# Altium PCB Pixracer_V1_FMU_Alternative.PcbDoc
Units mil, origin at the board's own origin, x right, y up, seen from the top; angles counter-clockwise.
Board outline 5849.21 x 3487.01 mil, 2 copper layers (Top, Bottom); 139 components, 145 nets, 555 pads, 0 vias.
Unrouted connection lines stored in the file: 97.
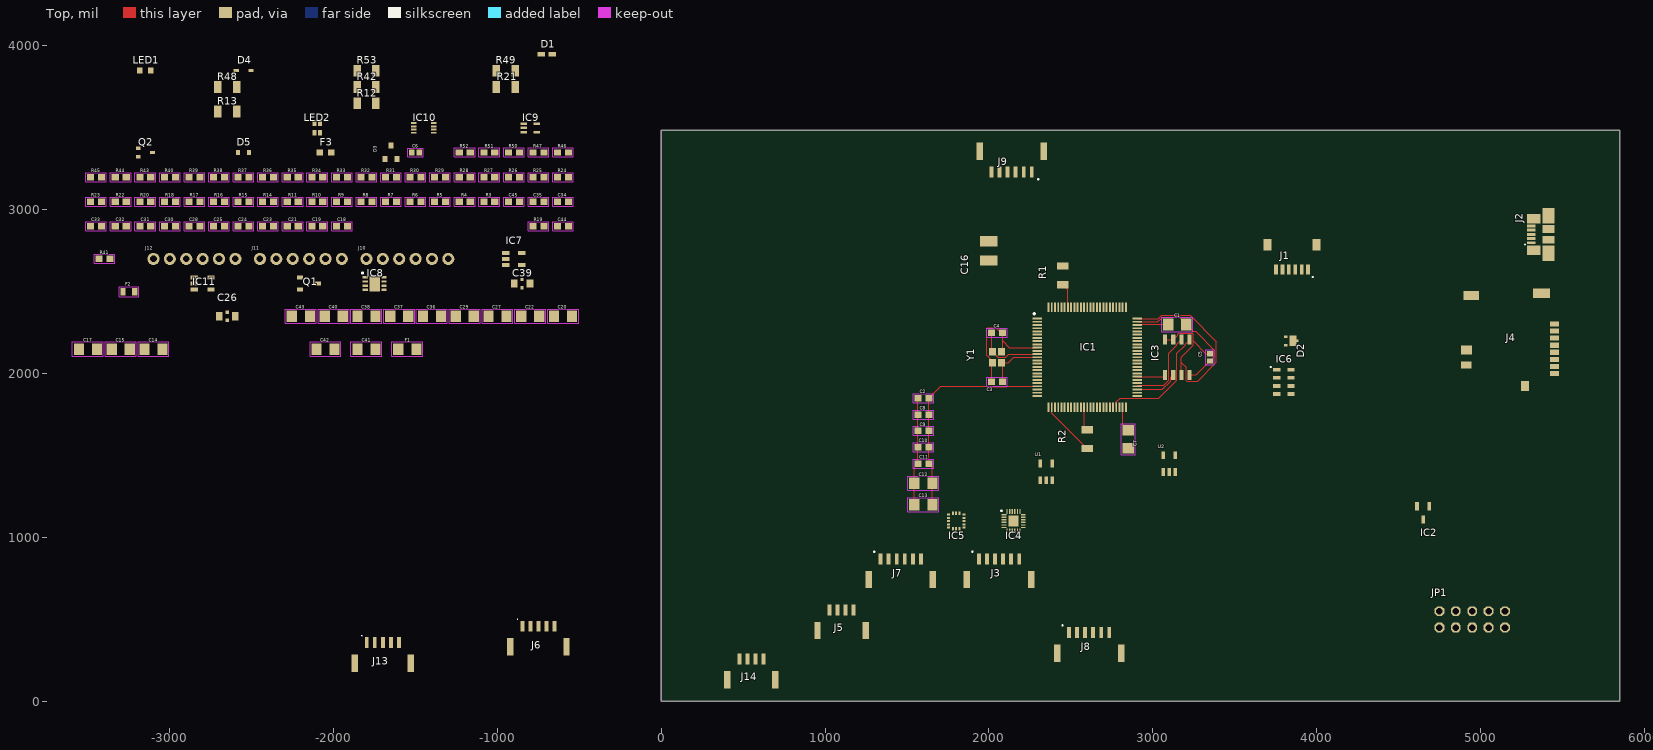
[diagram p0: Top view]
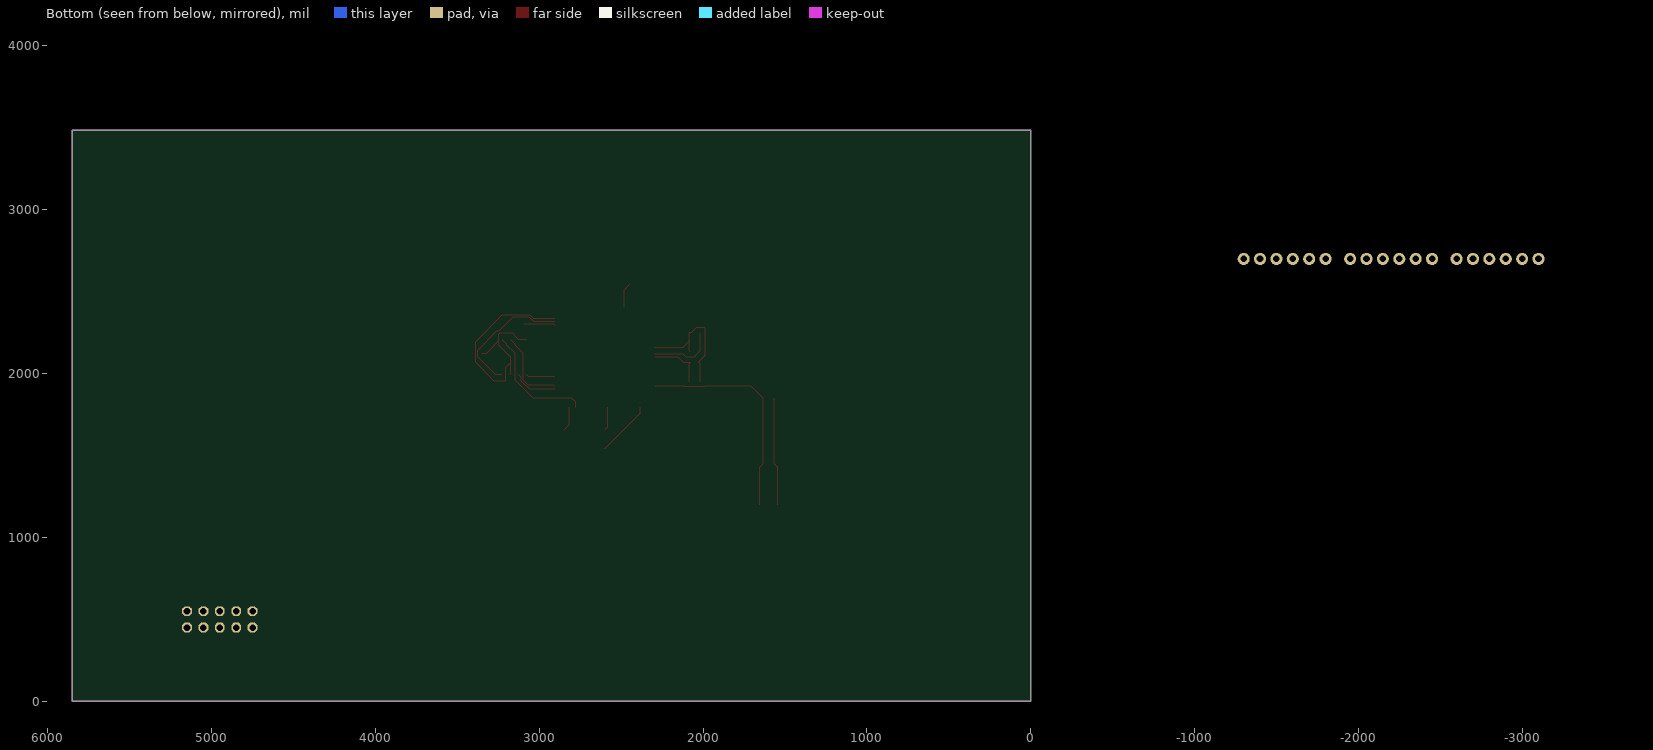
[diagram p1: Bottom view, seen from below]

## Layer stack, top to bottom
Top Solder: solder mask 0.4, Solder Resist, Dk 3.5
Top: signal copper 1.378
Dielectric 1: dielectric 12.6, FR-4, Dk 4.8
Bottom: signal copper 1.378
Bottom Solder: solder mask 0.4, Solder Resist, Dk 3.5

## Board outline
0,3487.01 0,0 5849.21,0 5849.21,3487.01

## Design rules (kind name [scope] priority, off if disabled: settings)
BoardOutlineClearance mdCopperDimension [All] p1: gap=10 ignorepadtopadclearanceinfootprint=FALSE except(0: Arc-SplitContinuation Track-SplitContinuation SMDPad-SplitContinuation THPad-SplitContinuation Via-SplitContinuation Fill-SplitContinuation Poly-SplitContinuation Region-SplitContinuation Text-SplitContinuation; 40: Poly-OutlineEdge Poly-CavityEdge Poly-CutoutEdge Poly-SplitBarrior)
Clearance "Clearance (Same Net)" [All] p1: gap=6 ignorepadtopadclearanceinfootprint=FALSE
Clearance [All] p2: gap=6 ignorepadtopadclearanceinfootprint=FALSE
HoleSize [All] p1: absolutevalues=TRUE maxlimit=100000 minlimit=13.78 maxpercent=80.000 minpercent=20.000
HoleToHoleClearance mdDrill [All] p1: gap=6 allowstackedmicrovias=TRUE
MinimumSolderMaskSliver [All] p1 off: minsoldermaskwidth=10
PasteMaskExpansion mlMinCreamFrame [All] p1: expansion=0
PolygonConnect ThermalVias [IsVia] p1: connectstyle=Direct reliefconductorwidth=10 reliefentries=4 polygonreliefangle="90 Angle" airgapwidth=10
PolygonConnect [All] p2: connectstyle=Relief reliefconductorwidth=10 reliefentries=4 polygonreliefangle="90 Angle" airgapwidth=10
RoutingVias [All] p1: holewidth=13.78 width=29.78 viastyle="Through Hole" minholewidth=13.78 minwidth=29.78 maxholewidth=100 maxwidth=100
SolderMaskExpansion mlMinStopFrame [All] p1: expansion=4 istentingtop=FALSE
Width [All] p1: maxlimit=10 minlimit=6 preferedwidth=6
26 further rules are at their usual default settings.

## Components (designator, comment, footprint, x,y, rotation, side; value= is the part's Value field where it differs from the comment)
C1 "2.2uF" 1206 3150,2300 r0 top
C2 "0.1uF" 0603 1600,1850 r0 top
C3 "8.0pF" 0603 2050,1950 r180 top
C4 "8.0pF" 0603 2050,2250 r0 top
C5 "0.1uF" 0402 3350,2100 r90 top
C6 "0.1uF" 0402 -1500,3350 r0 top
C7 "2.2uF" 1206 2850,1600 r270 top
C8 "0.1uF" 0603 1600,1750 r0 top
C9 "0.1uF" 0603 1600,1650 r0 top
C10 "0.1uF" 0603 1600,1550 r0 top
C11 "0.1uF" 0603 1600,1450 r0 top
C12 "2.2uF" 1206 1600,1330 r0 top
C13 "2.2uF" 1206 1600,1200 r0 top
C14 "2.2uF" 1206 -3100,2150 r0 top
C15 "10uF" 1206 -3300,2150 r0 top
C16 "" 4TPE220MBB 2000,2750 r270 top
C17 "2.2uF" 1206 -3500,2150 r0 top
C18 "0.1uF" 0603 -1950,2900 r0 top
C19 "0.1uF" 0603 -2100,2900 r0 top
C20 "2.2uF" 1206 -600,2350 r0 top
C21 "0.1uF" 0603 -2250,2900 r0 top
C22 "2.2uF" 1206 -800,2350 r0 top
C23 "0.1uF" 0603 -2400,2900 r0 top
C24 "470nF" 0603 -2550,2900 r0 top
C25 "0.1uF" 0603 -2700,2900 r0 top
C26 "" W2H13C1048AT1A -2650,2350 r0 top
C27 "2.2uF" 1206 -1000,2350 r0 top
C28 "0.1uF" 0603 -2850,2900 r0 top
C29 "10uF" 1206 -1200,2350 r0 top
C30 "0.1uF" 0603 -3000,2900 r0 top
C31 "0.1uF" 0603 -3150,2900 r0 top
C32 "0.1uF" 0603 -3300,2900 r0 top
C33 "10nF" 0603 -3450,2900 r0 top
C34 "10nF" 0603 -600,3050 r0 top
C35 "0.1uF" 0603 -750,3050 r0 top
C36 "2.2uF" 1206 -1400,2350 r0 top
C37 "2.2uF" 1206 -1600,2350 r0 top
C38 "2.2uF" 1206 -1800,2350 r0 top
C39 "" W2H13C1048AT1A -850,2550 r0 top
C40 "2.2uF" 1206 -2000,2350 r0 top
C41 "100uF" 1206-POLAR -1800,2150 r0 top
C42 "100uF" 1206-POLAR -2050,2150 r0 top
C43 "10uF" 1206 -2200,2350 r0 top
C44 "10uF" 0603-POLAR -600,2900 r0 top
C45 "0.1uF" 0603 -900,3050 r0 top
D1 "" DIOM179X85N -700,3950 r0 top
D2 "" PMEG2020CPASX 3845,2200 r270 top
D3 "5.6V" SOT23-3 -1650,3350 r0 top
D4 "" SODFL2512X80N -2550,3850 r0 top
D5 "" 1N4448XTP -2550,3350 r0 top
F1 "2A RST FUSE" 1206 -1550,2150 r0 top
F2 "0.3A RST FUSE" 0805 -3250,2500 r0 top
F3 "" 0603L050SLYR -2050,3350 r0 top
IC1 "STM32F427VIT6" QFP50P1600X1600X160-100N 2600,2100 r0 top
IC2 "" SOT95P237X112-3N 4650,1150 r180 top
IC3 "" SOIC127P602X173-8N 3150,2100 r90 top
IC4 "" QFN40P300X300X105-25N 2150,1100 r0 top
IC5 "" IAM20680HP 1800,1100 r0 top
IC6 "" MS561101BA03-50 3800,1950 r0 top
IC7 "" SOT95P280X145-5N -900,2700 r0 top
IC8 "" SON65P300X300X100-9N -1750,2550 r0 top
IC9 "" SOT65P210X110-5N -800,3500 r0 top
IC10 "" SOP50P310X100-8N -1450,3500 r0 top
IC11 "" SOT95P285X130-5N -2800,2550 r0 top
J1 "" SM06B-SRSS-TB 3850,2650 r180 top
J2 "" 47346-0001 5500,2850 r270 top
J3 "" SM06B-GHS-TB 1850,700 r0 top
J4 "" PJS00821200 4900,2200 r0 top
J5 "" SM04B-GHS-TB 1100,550 r0 top
J6 "" SM05B-GHS-TB -750,450 r0 top
J7 "" SM06B-GHS-TB 1250,700 r0 top
J8 "" SM06B-GHS-TB 2400,250 r0 top
J9 "" SM06B-GHS-TB 2350,3400 r180 top
J10 "" 1X06_NO_SILK -1800,2700 r0 top
J11 "" 1X06_NO_SILK -2450,2700 r0 top
J12 "" 1X06_NO_SILK -3100,2700 r0 top
J13 "" SM05B-GHS-TB -1700,350 r0 top
J14 "" SM04B-GHS-TB 550,250 r0 top
JP1 "" 2X05 4950,500 r0 top
LED1 "" LEDC1608X28N -3150,3850 r0 top
LED2 "" LTST-C19HE1WT -2100,3500 r0 top
Q1 "" SOT95P280X130-3N -2150,2550 r0 top
Q2 "" SOT65P210X100-3N -3150,3350 r0 top
R1 "" RESC3216X74N 2450,2600 r90 top
R2 "" RESC3216X74N 2600,1600 r90 top
R3 "220" 0603 -1050,3050 r0 top
R4 "1k" 0603 -1200,3050 r0 top
R5 "220" 0603 -1350,3050 r0 top
R6 "22Ω" 0603 -1500,3050 r0 top
R7 "22Ω" 0603 -1650,3050 r0 top
R8 "1k" 0603 -1800,3050 r0 top
R9 "1k" 0603 -1950,3050 r0 top
R10 "1M" 0603 -2100,3050 r0 top
R11 "1M" 0603 -2250,3050 r0 top
R12 "" RESC3216X74N -1800,3650 r0 top
R13 "" RESC3216X74N -2650,3600 r0 top
R14 "100k" 0603 -2400,3050 r0 top
R15 "100k" 0603 -2550,3050 r0 top
R16 "100k" 0603 -2700,3050 r0 top
R17 "100k" 0603 -2850,3050 r0 top
R18 "100k" 0603 -3000,3050 r0 top
R19 "120OHM" 0603 -750,2900 r0 top
R20 "220" 0603 -3150,3050 r0 top
R21 "" RESC3216X74N -950,3750 r0 top
R22 "1k" 0603 -3300,3050 r0 top
R23 "1k" 0603 -3450,3050 r0 top
R24 "220" 0603 -600,3200 r0 top
R25 "220" 0603 -750,3200 r0 top
R26 "220" 0603 -900,3200 r0 top
R27 "220" 0603 -1050,3200 r0 top
R28 "220" 0603 -1200,3200 r0 top
R29 "220" 0603 -1350,3200 r0 top
R30 "220" 0603 -1500,3200 r0 top
R31 "220" 0603 -1650,3200 r0 top
R32 "1.5k" 0603 -1800,3200 r0 top
R33 "1.5k" 0603 -1950,3200 r0 top
R34 "220" 0603 -2100,3200 r0 top
R35 "220" 0603 -2250,3200 r0 top
R36 "220" 0603 -2400,3200 r0 top
R37 "220" 0603 -2550,3200 r0 top
R38 "220" 0603 -2700,3200 r0 top
R39 "220" 0603 -2850,3200 r0 top
R40 "1.5k" 0603 -3000,3200 r0 top
R41 "68OHM-0603-1/10W-1%" 0603 -3400,2700 r0 top
R42 "" RESC3216X74N -1800,3750 r0 top
R43 "470" 0603 -3150,3200 r0 top
R44 "220" 0603 -3300,3200 r0 top
R45 "220" 0603 -3450,3200 r0 top
R46 "220" 0603 -600,3350 r0 top
R47 "10" 0603 -750,3350 r0 top
R48 "" RESC3216X74N -2650,3750 r0 top
R49 "" RESC3216X74N -950,3850 r0 top
R50 "100" 0603 -900,3350 r0 top
R51 "100" 0603 -1050,3350 r0 top
R52 "100" 0603 -1200,3350 r0 top
R53 "" RESC3216X74N -1800,3850 r0 top
U1 "" SOT23-5 2350,1400 r0 top
U2 "" SOT23-5 3100,1450 r0 top
Y1 "" FA20H160000MF12ZAC3 2050,2100 r90 top

## Footprints (in the part's own frame and the unit in brackets; to place one, negate y for a bottom-side part, rotate by r counter-clockwise, add the part's x,y. Pads: shape width x height; smd on the part's side, far side on the other; paste and mask are expansions set on the pad)
1N4448XTP [mil] "1N4448XTP"
  rect 23.62x31.5 smd: 1(-33.46,0) 2(33.46,0)
1X06_NO_SILK [mil] "1X06_NO_SILK"
  round 74 hole 40: 1(0,0) 2(100,0) 3(200,0) 4(300,0) 5(400,0) 6(500,0)
2X05 [mil] "2X05"
  oct 60x60 / inner round 55.43 / far side oct 60x60 hole 40: 1(-200,-50) 2(-200,50) 3(-100,-50) 4(-100,50) 5(0,-50) 6(0,50) 7(100,-50) 8(100,50) 9(200,-50) 10(200,50)
4TPE220MBB [mil] "4TPE220MBB"
  rect 62.99x106.3 smd: 1(-59.06,0) 2(59.06,0)
0402 [mil] "0402"
  rect 33.46x35.43 smd: 1(-22.83,0) 2(22.83,0)
  Top keep-out lines w2: -47.24,25.59 -47.24,-25.59 47.24,-25.59 47.24,25.59 -47.24,25.59
0603 [mm] "0603"
  rect 1.1x1 smd: 1(-0.85,0) 2(0.85,0)
  Top keep-out lines w0.051: -1.6,-0.7 -1.6,0.7 1.6,0.7 1.6,-0.7 -1.6,-0.7
0603-POLAR [mm] "0603-POLAR"
  rect 1.1x1 smd: +(0.85,0) -(-0.85,0)
  Top keep-out lines w0.051: -1.6,-0.7 -1.6,0.7 1.6,0.7 1.6,-0.7 -1.6,-0.7
0603L050SLYR [mm] "0603L050SLYR"
  rect 1x1 smd: 1(-0.9,0) 2(0.9,0)
0805 [mil] "0805"
  rect 31.5x47.24 smd: 1(-35.43,0) 2(35.43,0)
  Top keep-out lines w2: -59.06,-31.5 -59.06,31.5 59.06,31.5 59.06,-31.5 -59.06,-31.5
1206 [mil] "1206"
  rect 62.99x70.87 smd: 1(-55.12,0) 2(55.12,0)
  Top keep-out lines w2: -94.49,-43.31 -94.49,43.31 94.49,43.31 94.49,-43.31 -94.49,-43.31
1206-POLAR [mil] "1206-POLAR"
  rect 62.99x70.87 smd: 1(-55.12,0) 2(55.12,0)
  Top keep-out lines w2: -94.49,-43.31 -94.49,43.31 94.49,43.31 94.49,-43.31 -94.49,-43.31
47346-0001 [mm] "47346-0001"
  rect 0.45x1.38 smd: 1(1.3,-4.81) 2(0.65,-4.81) 3(0,-4.81) 4(-0.65,-4.81) 5(-1.3,-4.81)
  rect 1.475x2.1 smd: 6(-2.453,-4.45) 7(2.453,-4.45)
  rect 1.175x1.9 smd: 8(0.837,-2.15) 9(-0.837,-2.15)
  rect 2.375x1.9 smd: 10(2.913,-2.15) 11(-2.913,-2.15)
  silkscreen extent 1.53,-5.84 1.62,-5.74
DIOM179X85N [mil] "DIOM179X85N"
  rect 45.28x29.53 smd: 1(-33.46,0) 2(33.46,0)
FA20H160000MF12ZAC3 [mil] "FA20H160000MF12ZAC3"
  rect 47.24x43.31 smd: 1(-33.46,-27.56) 2(33.46,-27.56) 3(33.46,27.56) 4(-33.46,27.56)
IAM20680HP [mm] "IAM20680HP"
  rect 0.5x0.3 smd: 1(-1.2,1) 2(-1.2,0.5) 3(-1.2,0) 4(-1.2,-0.5) 5(-1.2,-1) 9(1.2,-1) 10(1.2,-0.5) 11(1.2,0) 12(1.2,0.5) 13(1.2,1)
  rect 0.3x0.5 smd: 6(-0.5,-1.2) 7(0,-1.2) 8(0.5,-1.2) 14(0.5,1.2) 15(0,1.2) 16(-0.5,1.2)
LEDC1608X28N [mil] "LEDC1608X28N"
  rect 31.5x37.4 smd: 1(-33.46,0) 2(33.46,0)
LTST-C19HE1WT [mm] "LTST-C19HE1WT"
  rect 0.65x0.85 smd: 1(-0.425,0.725) 2(0.425,0.725) 3(0.425,-0.725) 4(-0.425,-0.725)
MS561101BA03-50 [mil] "MS561101BA03-50"
  rect 43.31x23.62 smd: 1(-43.31,73.82) 2(-43.31,24.61) 3(-43.31,-24.61) 4(-43.31,-73.82) 5(43.31,-73.82) 6(43.31,-24.61) 7(43.31,24.61) 8(43.31,73.82)
  silkscreen extent -82,89 -78,92
PJS00821200 [mil] "PJS00821200"
  rect 55.12x31.5 smd: 1(551.18,103.35) 2(551.18,60.04) 3(551.18,16.73) 4(551.18,-26.57) 5(551.18,-69.88) 6(551.18,-113.19) 7(551.18,-156.5) 8(551.18,-199.8)
  rect 51.18x59.06 smd: CD1(372.05,-275.59)
  rect 102.36x57.09 smd: G1(472.44,290.35)
  rect 94.49x55.12 smd: G2(43.31,277.56)
  rect 67.72x55.12 smd: G3(14.17,-55.12)
  rect 65.75x43.31 smd: MP1(13.19,-147.64)
PMEG2020CPASX [mm] "PMEG2020CPASX"
  rect 0.4x0.6 smd: 1(-0.65,-0.85) 2(0.65,-0.85)
  rect 1.6x1.1 smd: 3(0,0.25)
  rect 0.4x0.35 smd: 4(0,0.975)
QFN40P300X300X105-25N [mm] "QFN40P300X300X105-25N"
  rect 0.75x0.2 smd: 1(-1.5,1) 2(-1.5,0.6) 3(-1.5,0.2) 4(-1.5,-0.2) 5(-1.5,-0.6) 6(-1.5,-1) 13(1.5,-1) 14(1.5,-0.6) 15(1.5,-0.2) 16(1.5,0.2) 17(1.5,0.6) 18(1.5,1)
  rect 0.2x0.75 smd: 7(-1,-1.5) 8(-0.6,-1.5) 9(-0.2,-1.5) 10(0.2,-1.5) 11(0.6,-1.5) 12(1,-1.5) 19(1,1.5) 20(0.6,1.5) 21(0.2,1.5) 22(-0.2,1.5) 23(-0.6,1.5) 24(-1,1.5)
  rect 1.59x1.75 smd: 25(0,0)
  silkscreen extent -1.97,1.5 -1.77,1.7
QFP50P1600X1600X160-100N [mm] "QFP50P1600X1600X160-100N"
  rect 1.475x0.3 smd: 1(-7.738,6) 2(-7.738,5.5) 3(-7.738,5) 4(-7.738,4.5) 5(-7.738,4) 6(-7.738,3.5) 7(-7.738,3) 8(-7.738,2.5) 9(-7.738,2) 10(-7.738,1.5) 11(-7.738,1) 12(-7.738,0.5) 13(-7.738,0) 14(-7.738,-0.5) 15(-7.738,-1) 16(-7.738,-1.5) 17(-7.738,-2) 18(-7.738,-2.5) 19(-7.738,-3) 20(-7.738,-3.5) 21(-7.738,-4) 22(-7.738,-4.5) 23(-7.738,-5) 24(-7.738,-5.5) 25(-7.738,-6) 51(7.738,-6) 52(7.738,-5.5) 53(7.738,-5) 54(7.738,-4.5) 55(7.738,-4) 56(7.738,-3.5) 57(7.738,-3) 58(7.738,-2.5) 59(7.738,-2) 60(7.738,-1.5) 61(7.738,-1) 62(7.738,-0.5) 63(7.738,0) 64(7.738,0.5) 65(7.738,1) 66(7.738,1.5) 67(7.738,2) 68(7.738,2.5) 69(7.738,3) 70(7.738,3.5) 71(7.738,4) 72(7.738,4.5) 73(7.738,5) 74(7.738,5.5) 75(7.738,6)
  rect 0.3x1.475 smd: 26(-6,-7.738) 27(-5.5,-7.738) 28(-5,-7.738) 29(-4.5,-7.738) 30(-4,-7.738) 31(-3.5,-7.738) 32(-3,-7.738) 33(-2.5,-7.738) 34(-2,-7.738) 35(-1.5,-7.738) 36(-1,-7.738) 37(-0.5,-7.738) 38(0,-7.738) 39(0.5,-7.738) 40(1,-7.738) 41(1.5,-7.738) 42(2,-7.738) 43(2.5,-7.738) 44(3,-7.738) 45(3.5,-7.738) 46(4,-7.738) 47(4.5,-7.738) 48(5,-7.738) 49(5.5,-7.738) 50(6,-7.738) 76(6,7.738) 77(5.5,7.738) 78(5,7.738) 79(4.5,7.738) 80(4,7.738) 81(3.5,7.738) 82(3,7.738) 83(2.5,7.738) 84(2,7.738) 85(1.5,7.738) 86(1,7.738) 87(0.5,7.738) 88(0,7.738) 89(-0.5,7.738) 90(-1,7.738) 91(-1.5,7.738) 92(-2,7.738) 93(-2.5,7.738) 94(-3,7.738) 95(-3.5,7.738) 96(-4,7.738) 97(-4.5,7.738) 98(-5,7.738) 99(-5.5,7.738) 100(-6,7.738)
  silkscreen extent -8.35,6.63 -8.1,6.87
RESC3216X74N [mil] "RESC3216X74N"
  rect 45.28x70.87 smd: 1(-57.09,0) 2(57.09,0)
SM04B-GHS-TB [mm] "SM04B-GHS-TB"
  rect 0.6x1.7 smd: 1(-1.875,0.2) 2(-0.625,0.2) 3(0.625,0.2) 4(1.875,0.2)
  rect 1x2.7 smd: 5(-3.725,-3) 6(3.725,-3)
SM05B-GHS-TB [mm] "SM05B-GHS-TB"
  rect 0.6x1.7 smd: 1(-2.5,0.2) 2(-1.25,0.2) 3(0,0.2) 4(1.25,0.2) 5(2.5,0.2)
  rect 1x2.7 smd: 6(-4.35,-3) 7(4.35,-3)
  silkscreen extent -3.3,1.25 -3.23,1.32
SM06B-GHS-TB [mm] "SM06B-GHS-TB"
  rect 0.6x1.7 smd: 1(2.25,4.3) 2(3.5,4.3) 3(4.75,4.3) 4(6,4.3) 5(7.25,4.3) 6(8.5,4.3)
  rect 1x2.7 smd: 7(0.4,1.1) 8(10.35,1.1)
  silkscreen extent 1.19,5.35 1.31,5.47
SM06B-SRSS-TB [mil] "SM06B-SRSS-TB"
  rect 23.62x61.02 smd: 1(-98.43,15.75) 2(-59.06,15.75) 3(-19.69,15.75) 4(19.69,15.75) 5(59.06,15.75) 6(98.43,15.75)
  rect 47.24x70.87 smd: 7(149.61,-136.81) 8(-149.61,-136.81)
  silkscreen extent -129,57 -124,62
SODFL2512X80N [mm] "SODFL2512X80N"
  rect 0.84x0.46 smd: 1(-1.15,0) 2(1.15,0)
SOIC127P602X173-8N [mm] "SOIC127P602X173-8N"
  rect 1.551x0.65 smd: 1(-2.725,1.905) 2(-2.725,0.635) 3(-2.725,-0.635) 4(-2.725,-1.905) 5(2.725,-1.905) 6(2.725,-0.635) 7(2.725,0.635) 8(2.725,1.905)
SON65P300X300X100-9N [mm] "SON65P300X300X100-9N"
  rect 0.85x0.35 smd: 1(-1.45,0.975) 2(-1.45,0.325) 3(-1.45,-0.325) 4(-1.45,-0.975) 5(1.45,-0.975) 6(1.45,-0.325) 7(1.45,0.325) 8(1.45,0.975)
  rect 1.65x2.45 smd: 9(0,0)
  silkscreen extent -2,1.53 -1.75,1.77
SOP50P310X100-8N [mil] "SOP50P310X100-8N"
  rect 33.46x11.81 smd: 1(-62.01,29.53) 2(-62.01,9.84) 3(-62.01,-9.84) 4(-62.01,-29.53) 5(62.01,-29.53) 6(62.01,-9.84) 7(62.01,9.84) 8(62.01,29.53)
SOT23-3 [mil] "SOT23-3"
  rect 31.5x35.43 smd: 1(-37.4,-39.37) 2(37.4,-39.37) 3(0,43.31)
SOT23-5 [mil] "SOT23-5"
  rect 21.65x47.24 smd: 1(-37.4,-51.19) 2(0,-51.19) 3(37.4,-51.19) 4(37.4,51.19) 5(-37.4,51.19)
SOT65P210X100-3N [mm] "SOT65P210X100-3N"
  rect 0.75x0.5 smd: 1(-1.1,0.65) 2(-1.1,-0.65) 3(1.1,0)
SOT65P210X110-5N [mm] "SOT65P210X110-5N"
  rect 1x0.4 smd: 1(-1,0.65) 2(-1,0) 3(-1,-0.65) 4(1,-0.65) 5(1,0.65)
SOT95P237X112-3N [mil] "SOT95P237X112-3N"
  rect 22x50 smd: 1(-37,-41) 2(37,-41) 3(0,41)
SOT95P280X130-3N [mil] "SOT95P280X130-3N"
  rect 35.43x23.62 smd: 1(-55.12,37.4) 2(-55.12,-37.4) 3(55.12,0)
SOT95P280X145-5N [mil] "SOT95P280X145-5N"
  rect 45.28x23.62 smd: 1(-49.21,37.4) 2(-49.21,0) 3(-49.21,-37.4) 4(49.21,-37.4) 5(49.21,37.4)
SOT95P285X130-5N [mil] "SOT95P285X130-5N"
  rect 45.28x23.62 smd: 1(-51.18,37.4) 2(-51.18,0) 3(-51.18,-37.4) 4(51.18,-37.4) 5(51.18,37.4)
W2H13C1048AT1A [mil] "W2H13C1048AT1A"
  rect 40.16x50 smd: 1(-48.23,0) 2(48.23,0)
  rect 20.08x20.08 smd: 3(0,25) 4(0,-25)

## Part data
C1 C7 C12 C13 C14 C15 C17 C20 C22 C27 C29 C36 C37 C38 C40 C43 F1: library part 1206, PackageName=1206
C2 C3 C4 C8 C9 C10 C11 C18 C19 C21 C23 C24 C25 C28 C30 C31 C32 C33 C34 C35 C45 R3 R4 R5 R6 R7 R8 R9 R10 R11 R14 R15 R16 R17 R18 R19 R20 R22 R23 R24 R25 R26 R27 R28 R29 R30 R31 R32 R33 R34 R35 R36 R37 R38 R39 R40 R41 R43 R44 R45 R46 R47 R50 R51 R52: library part 0603, PackageName=0603
C5 C6: library part 0402, PackageName=0402
C16: library part 4TPE220MBB, PackageName=4TPE220MBB
C26 C39: library part W2H13C1048AT1A, PackageName=W2H13C1048AT1A
C41 C42: library part 1206-POLAR, PackageName=1206-POLAR
C44: library part 0603-POLAR, PackageName=0603-POLAR
D1: library part DIOM179X85N, PackageName=DIOM179X85N
D2: library part PMEG2020CPASX, PackageName=PMEG2020CPASX
D3: library part SOT23-3, PackageName=SOT23-3
D4: library part SODFL2512X80N, PackageName=SODFL2512X80N
D5: library part 1N4448XTP, PackageName=1N4448XTP
F2: library part 0805, PackageName=0805
F3: library part 0603L050SLYR, PackageName=0603L050SLYR
IC1: library part QFP50P1600X1600X160-100N, PackageName=QFP50P1600X1600X160-100N
IC2: library part SOT95P237X112-3N, PackageName=SOT95P237X112-3N
IC3: library part SOIC127P602X173-8N, PackageName=SOIC127P602X173-8N
IC4: library part QFN40P300X300X105-25N, PackageName=QFN40P300X300X105-25N
IC5: library part IAM20680HP, PackageName=IAM20680HP
IC6: library part MS561101BA03-50, PackageName=MS561101BA03-50
IC7: library part SOT95P280X145-5N, PackageName=SOT95P280X145-5N
IC8: library part SON65P300X300X100-9N, PackageName=SON65P300X300X100-9N
IC9: library part SOT65P210X110-5N, PackageName=SOT65P210X110-5N
IC10: library part SOP50P310X100-8N, PackageName=SOP50P310X100-8N
IC11: library part SOT95P285X130-5N, PackageName=SOT95P285X130-5N
J1: library part SM06B-SRSS-TB, PackageName=SM06B-SRSS-TB
J2: library part 47346-0001, PackageName=47346-0001
J3 J7 J8 J9: library part SM06B-GHS-TB, PackageName=SM06B-GHS-TB
J4: library part PJS00821200, PackageName=PJS00821200
J5 J14: library part SM04B-GHS-TB, PackageName=SM04B-GHS-TB
J6 J13: library part SM05B-GHS-TB, PackageName=SM05B-GHS-TB
J10 J11 J12: library part 1X06_NO_SILK, PackageName=1X06_NO_SILK
JP1: library part 2X05, PackageName=2X05
LED1: library part LEDC1608X28N, PackageName=LEDC1608X28N
LED2: library part LTST-C19HE1WT, PackageName=LTST-C19HE1WT
Q1: library part SOT95P280X130-3N, PackageName=SOT95P280X130-3N
Q2: library part SOT65P210X100-3N, PackageName=SOT65P210X100-3N
R1 R2 R12 R13 R21 R42 R48 R49 R53: library part RESC3216X74N, PackageName=RESC3216X74N
U1 U2: library part SOT23-5, PackageName=SOT23-5
Y1: library part FA20H160000MF12ZAC3, PackageName=FA20H160000MF12ZAC3

## Nets (pads, with @x,y where several pads share a name; then routed paths per layer and width w, separated by ;. In a path a pad name is that pad's centre, name@x,y a point inside that pad or via, vN(x,y) a via of type N, cw(c..) or ccw(c..) an arc to the next point about the centre after c; other vN are vias at no path point)
8266_CTS: IC1.41 JP1.10
8266_GPIO0: IC1.1 JP1.6
8266_GPIO2: IC1.90 JP1.4
8266_PD: IC1.4 JP1.3
8266_RST: IC1.5
8266_RTS: IC1.67 JP1.5 JP1.9
20608_CS: IC1.9 IC5.6
20608_DRDY: IC1.8 IC5.5
ALARM: IC1.77 R48.1
BARO_CS: IC1.88 IC6.5
BAT_VOLT_SENS: C34.1 R9.2
BATT_CURRENT_SENS: C33.1 IC1.26 R8.1
BATT_VOLT_SENS: IC1.25
BOOT0: IC1.94 R1.1 | length 151.5
  Top w6: R1.1 2481.89,2511.02 IC1.94
BOOT1: IC1.37 R2.2 | length 146.4
  Top w6: IC1.37 2580.32,1676.77 R2.2
BUZZER+: D5.1 J13.5 R47.2
BUZZER-: D5.2 J13.4 Q1.3
CAN1_RX: IC1.81 IC8.4
CAN1_TX: IC1.82 IC8.1
CAN2_RX: IC1.51
CAN2_TX: IC1.52
FMU_CH1: IC1.45 R34.2
FMU_CH2: IC1.44 R35.2
FMU_CH3: IC1.42 R36.2
FMU_CH4: IC1.40 R37.2
FMU_CH5: IC1.60 R38.2
FMU_CH6: IC1.61 R39.2
FMU_I2C1_SCL: IC1.95 J9.4 R32.2
FMU_I2C1_SDA: IC1.96 J9.5 R33.2
FMU_LED_BLUE: IC1.89 R52.1
FMU_LED_GREEN: IC1.36 R51.1
FMU_LED_RED: IC1.48 R50.1
FMU_RC_INPUT: IC1.64 IC9.4
FMU_SWCLK: IC1.76 J1.5
FMU_SWDIO: IC1.72 J1.4
FMU_UART7_RX: IC1.38 J1.3
FMU_UART7_TX: IC1.39 J1.2
FMU_USART1_TX: IC1.92 JP1.8
FMU_USART2_CTS: IC1.84 R30.1
FMU_USART2_RTS: IC1.85 R31.1
FMU_USART2_RX: IC1.87 R29.2
FMU_USART2_TX: IC1.86 R28.2
FMU_USART3_CTS: IC1.58 R26.1
FMU_USART3_RTS: IC1.59 R27.1
FMU_USART3_RX: IC1.56 R25.2
FMU_USART3_TX: IC1.55 R24.2
FMU_USART4_RX: IC1.24 J9.3
FMU_USART4_TX: IC1.23 J9.2
FMU_USART8_RX: IC1.97 IC10.3
FMU_USART8_TX: IC1.98 IC10.2
FMU_USART_RX: IC1.93 JP1.1
FMU_VBAT: C16.1 D1.1 IC1.6
FMU_VDD_3V3: C2.2 C5.2 C6.2 C8.2 C9.2 C10.2 C11.2 C12.2 C13.2 C15.1 C35.2 IC1.11 IC1.19 IC1.21 IC1.22 IC1.28 IC1.50 IC1.75 IC1.100 IC2.2 IC3.3 IC3.7 IC3.8 IC8.5 IC9.5 IC10.8 J1.1 J4.4 J13.3 LED2.4 R3.2 R4.1 R14.2 R15.1 R16.1 R17.1 R18.1 R32.1 R33.1 U2.5 | length 3000.8
  Top w6: C13.2 C12.2 1655.12,1428.35 C11.2 C10.2 C9.2 C8.2 C2.2 1706.3,1922.83 1989.63,1922.83 1991.15,1921.32 2108.85,1921.32 2110.37,1922.83 IC1.22 ; IC1.75 3034.47,2336.22 3054.69,2356.43 3228.34,2356.43 3388.72,2196.06 3388.72,2068.71 3273.2,1953.19 3208.48,1953.19 3203.2,1958.46 3203.2,2037.66 3175,2065.87 ; IC3.8 IC3.7 3153.2,2235.49 3153.2,2241.54 3158.48,2246.82 3241.52,2246.82 3246.8,2241.54 3246.8,2200 ; IC3.3 3175,2000 3175,2065.87 ; C5.2 3323.96,2122.83 3246.8,2200 ; 3175,2065.87 3175,2101.23 3246.8,2173.02 3246.8,2200
FRAM_CS: IC1.57 IC3.1 | length 174.8
  Top w6: IC1.57 3064.17,1981.89 IC3.1
FRAM_MISO: IC1.53 IC3.2 IC6.6 | length 270.9
  Top w6: IC1.53 3058.46,1903.15 3108.8,1953.49 3108.8,1976.51 IC3.2
FRAM_MOSI: IC1.54 IC3.6 IC6.7 | length 488.1
  Top w6: IC1.54 2909.43,1927.61 3065.95,1927.61 3096.8,1958.46 3096.8,2123.02 3146.8,2173.02 3146.8,2179.08 IC3.6
FRAM_SCK: IC1.47 IC3.5 IC6.8 | length 738
  Top w6: IC1.47 2777.17,1827.17 2800,1850 2870.76,1850 2871.88,1848.87 3037.21,1848.87 3146.8,1958.46 3146.8,2123.02 3196.8,2173.02 3196.8,2179.08 IC3.5
FRSKY_IN: J14.3 R23.2
FRSKY_INV: IC1.69 IC10.1 IC10.5
FRSKY_OUT: J14.2 R22.2
GND: C1.2 C2.1 C3.2 C4.2 C5.1 C6.1 C7.2 C8.1 C9.1 C10.1 C11.1 C12.1 C13.1 C14.2 C15.2 C16.2 C17.2 C18.2 C19.1 C20.2 C21.2 C22.2 C23.2 C24.2 C25.2 C26.3 C26.4 C27.2 C28.2 C29.2 C30.2 C31.2 C32.1 C33.2 C34.2 C35.1 C36.2 C37.1 C38.1 C39.3 C39.4 C40.1 C41.2 C42.2 C43.2 C44.- C45.2 D3.1 IC1.10 IC1.20 IC1.27 IC1.74 IC1.99 IC2.3 IC3.4 IC4.11 IC4.18 IC4.20 IC5.7 IC5.8 IC5.9 IC5.10 IC5.11 IC5.12 IC5.13 IC5.15 IC6.2 IC6.3 IC7.2 IC8.2 IC8.8 IC8.9 IC9.3 IC10.4 IC11.2 J1.6 J2.5 J3.5 J3.6 J4.6 J4.G1 J4.G2 J4.G3 J5.4 J6.5 J7.6 J8.6 J9.6 J11.1 J11.2 J11.3 J11.4 J11.5 J11.6 J14.4 JP1.2 R1.2 R2.1 R3.1 R5.1 R10.1 R11.1 R13.2 R40.2 R43.1 R45.1 R46.1 R53.2 U1.2 U2.2 Y1.2 Y1.4 | length 2609.4
  Top w6: C13.1 C12.1 1544.88,1428.35 C11.1 C10.1 C9.1 C8.1 C2.1 ; C3.2 2016.54,2060.63 Y1.4 2022.44,2075.46 1985.88,2112.02 1985.88,2273.41 1991.15,2278.69 2041.92,2278.69 2070.6,2250 C4.2 2083.46,2200 ; Y1.2 2083.46,2139.37 2083.46,2200 ; IC1.10 2124.41,2159.06 2083.46,2200 ; IC1.27 2383.46,1759.45 R2.1 R2.1@2601.97,1544.88 ; IC1.74 3031.76,2316.54 3059.66,2344.43 3160.69,2344.43 C1.2 3246.3,2258.82 3261.2,2258.82 3376.72,2143.29 3376.72,2102.37 3371.44,2097.1 3369.94,2097.1 C5.1 3265.55,1992.72 IC3.4
HMC5983_CS: IC1.46
HMC5983_DRDY: IC1.43
ICM20948_CS: IC4.22
ICM20948_DRDY: IC4.12
ICM20948_MISO: IC1.31 IC4.9 IC5.4
ICM20948_MOSI: IC1.32 IC4.24 IC5.3
ICM20948_SCK: IC1.30 IC4.23 IC5.2
LED_SAFETY: IC1.18 R41.1
MPU9250_CS: IC1.17
MPU9250_DRDY: IC1.62
N$1: C22.1 C23.1 IC5.1 IC5.16
N$2: J2.3 R6.2
N$3: D1.2 R4.2
N$4: C26.2 C27.1 U1.1
N$5: C19.2 IC4.10
N$6: J2.2 R7.2
N$7: J3.1 J3.2
N$8: J3.3 R8.2 R10.2
N$9: C24.1 IC5.14
N$10: C39.2 J9.1
N$11: J6.2 R20.1
N$12: J3.4 R9.1 R11.2
N$13: J12.1 R34.1
N$14: J6.3 R21.2
N$15: J7.2 R24.1
N$16: J7.3 R25.1
N$17: IC8.7 J5.2 R19.1
N$18: J12.2 R35.1
N$19: IC8.6 J5.3 R19.2
N$20: J12.3 R36.1
N$21: IC10.7 R22.1
N$22: IC10.6 R23.1
N$23: J7.4 R26.2
N$24: J7.5 R27.2
N$25: J12.4 R37.1
N$26: J12.5 R38.1
N$27: J8.2 R28.1
N$28: J8.3 R29.1
N$29: J12.6 R39.1
N$30: Q1.1 R48.2 R49.1
N$31: J8.4 R30.2
N$32: J8.5 R31.2
N$33: J13.2 R41.2
N$34: Q1.2 R49.2
N$36: C41.1 D2.1 F1.2 R44.2
N$37: LED1.1 R46.2
N$38: LED2.1 R50.2
N$39: LED2.2 R51.2
N$40: D4.1 F2.1
N$41: LED2.3 R52.2
N$53: C1.1 IC1.73 | length 191.5
  Top w6: IC1.73 2907.8,2300 C1.1
N$99: C7.1 IC1.49 | length 154.1
  Top w6: IC1.49 2816.54,1688.58 C7.1
NRST: IC1.14 IC2.1
OSC_IN: C4.1 IC1.12 Y1.3 | length 414.9
  Top w6: C4.1 2016.54,2139.37 Y1.3 2027.95,2127.95 2046.91,2109 2046.91,2106.11 2052.18,2100.84 2102.94,2100.84 2121.78,2119.69 IC1.12
OSC_OUT: C3.1 IC1.13 Y1.1 | length 350.6
  Top w6: C3.1 2083.46,2060.63 Y1.1 2116.54,2066.54 2150,2100 IC1.13
OTG_FM_DP: IC1.71
OTG_FS_DM: IC1.70 R7.1
OTG_FS_DP: R6.1
RC_INPUT: IC1.35 IC9.1 R20.2
RSSI_IN: IC1.16 R21.1
SAFETY_SWITCH_IN: IC1.33 J13.1 R40.1
SBUS_INV: IC1.7 IC9.2
SDIO_CK: IC1.80 J4.5
SDIO_CMD: IC1.83 J4.3 R17.2
SDIO_D0: IC1.65 J4.7 R18.2
SDIO_D1: IC1.66 J4.8 R14.1
SDIO_D2: IC1.78 J4.1 R15.2
SDIO_D3: IC1.79 J4.2 R16.2
SPEKTRUM_POWER: IC1.3 Q2.1
VBUS: C32.2 D2.2 IC1.68 J2.1 R42.1 R43.2
VBUS_VALID: IC1.15 R42.2
VDD_1V8_SENSORS: C20.1 C21.1 C31.1 IC4.8 IC7.5
VDD_3V3_PERIPH: C44.+ C45.1 IC11.5 JP1.7 Q2.2
VDD_3V3_PERIPH_EN: IC1.34 IC11.3 R53.1
VDD_3V3_SENSORS: C17.1 C18.1 C25.1 C28.1 C29.1 IC4.13 IC6.1 R5.2 U1.5
VDD_3V3_SENSORS_EN: IC1.2 IC7.3 U1.3
VDD_3V3_SPEKTRUM: J6.4 Q2.3
VDD_5V_BRICK: F1.1
VDD_5V_IN: C14.1 C26.1 C30.1 C42.1 C43.1 D2.3 D3.3 D4.2 F3.1 IC7.1 IC11.1 LED1.2 R12.1 R47.1 U2.1 U2.3
VDD_5V_PERIPH: C36.1 C37.2 C38.2 C39.1 C40.2 F3.2 IC8.3 J5.1 J7.1 J8.1 J14.1
VDD_5V_RECEIVER: F2.2 J6.1
VDD_5V_SENS: IC1.29 R12.2 R13.1
VDD_BRICK_VALID: IC1.91 R44.1 R45.2
VDD_SERVO: J10.1 J10.2 J10.3 J10.4 J10.5 J10.6
pads on no net: D2.4 D3.2 IC1.63 IC4.1 IC4.2 IC4.3 IC4.4 IC4.5 IC4.6 IC4.7 IC4.14 IC4.15 IC4.16 IC4.17 IC4.19 IC4.21 IC4.25 IC6.4 IC7.4 IC11.4 J1.7 J1.8 J2.4 J2.6 J2.7 J2.8 J2.9 J2.10 J2.11 J3.7 J3.8 J4.CD1 J4.MP1 J5.5 J5.6 J6.6 J6.7 J7.7 J7.8 J8.7 J8.8 J9.7 J9.8 J13.6 J13.7 J14.5 J14.6 U1.4 U2.4

## Keep-outs
Keep-Out Layer:
  the board outline again, w0

## Silkscreen, mask and mechanical layers (free items; w line width, h text height)
Dimension:
  the board outline again, w0
Unrouted:
  drawing of 324 lines, arcs and shapes, not listed